# Altium PCB HU_revC_TEMP.PcbDoc (part 4 of 5)
Units mm, origin at the board's own origin, x right, y up, seen from the top; angles counter-clockwise.
Board outline 164 x 88 mm, 6 copper layers (Top Layer, Layer 1, Layer 2, Layer 3, Layer 4, Bottom Layer), stack 1.538 mm thick; 730 components, 570 nets, 2585 pads, 244 vias.
Unrouted connection lines stored in the file: 1558.
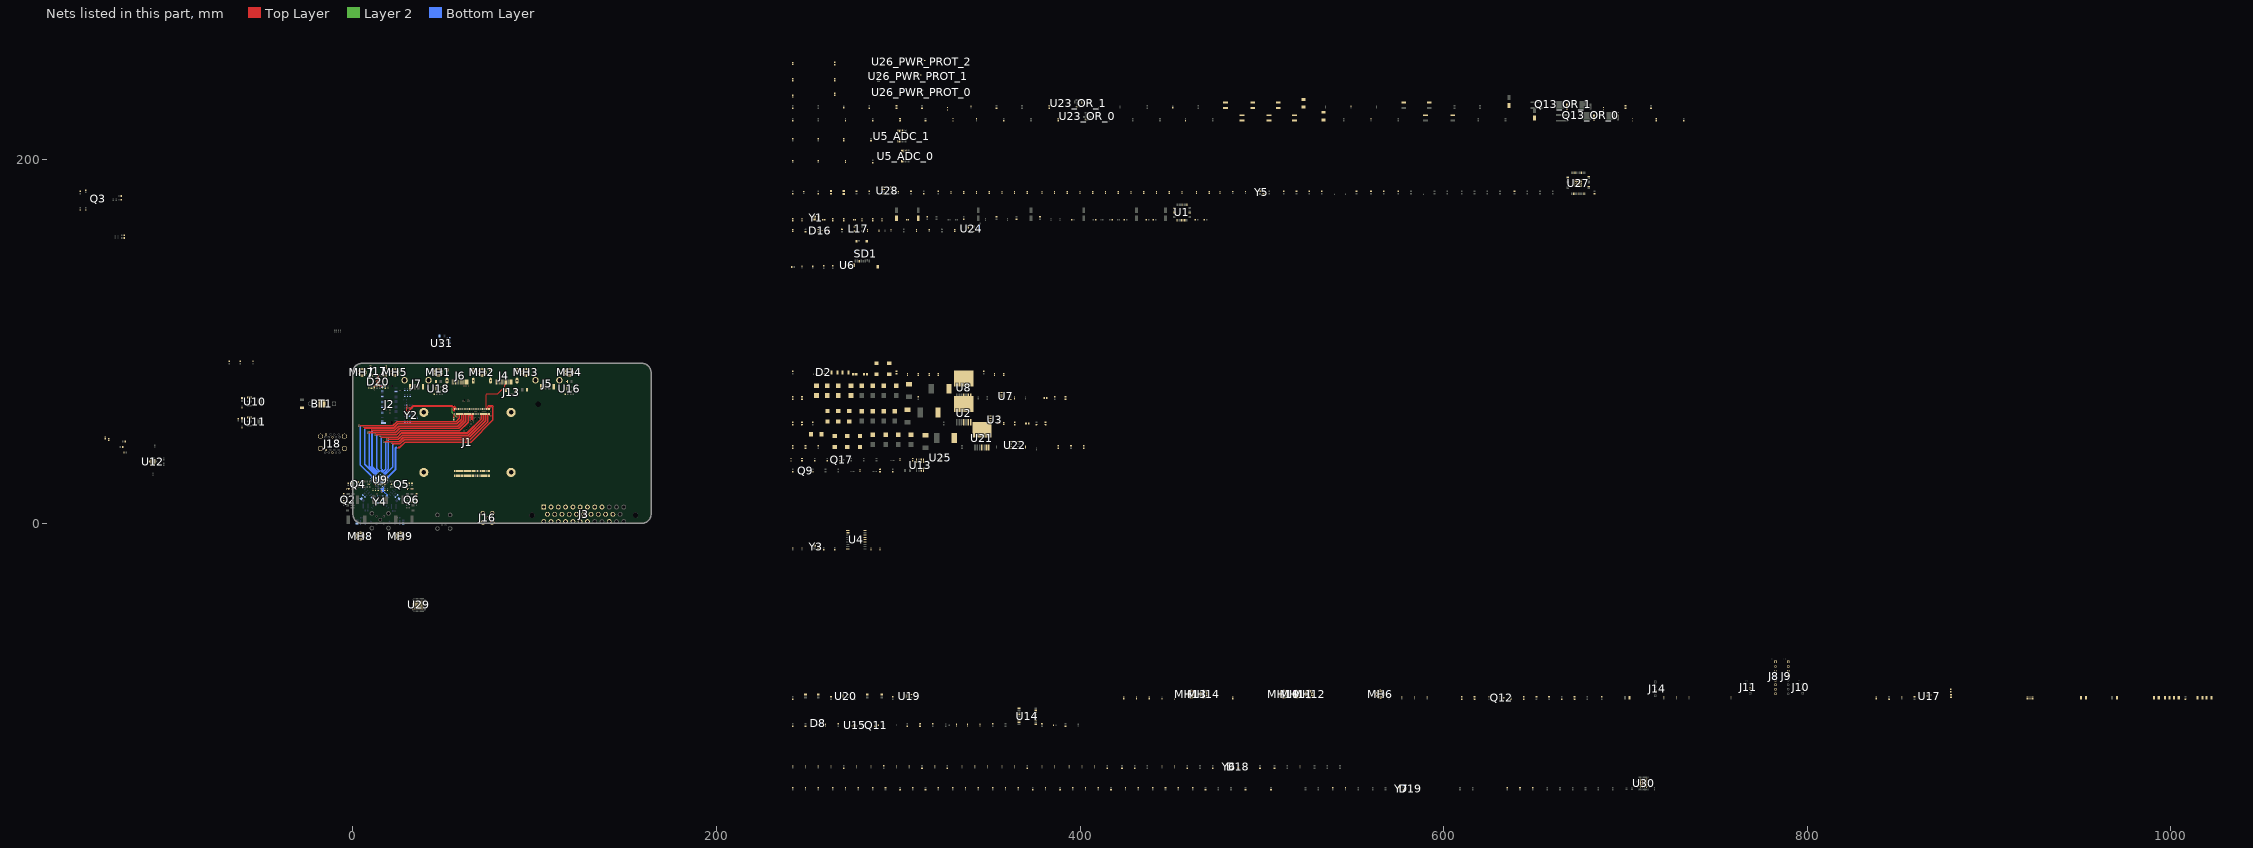
[diagram p4: the nets of this part, all layers, seen from the top]

## Via types
v1: diameter 0.5, hole 0.3, Top Layer to Bottom Layer, 244 vias

## Nets (pads, with @x,y where several pads share a name; then routed paths per layer and width w, separated by ;. In a path a pad name is that pad's centre, name@x,y a point inside that pad or via, vN(x,y) a via of type N, cw(c..) or ccw(c..) an arc to the next point about the centre after c; other vN are vias at no path point) (continued)
3V3_3V3_VCC_I_nFLT: R213_PWR_PROT_2.1 U26_PWR_PROT_2.6
3V3_3V3_VCC_I_SENSE: U26_PWR_PROT_2.11
3V3_5V0_MAIN_T_SENSE: R33.2 R36.2
3V3_5V0_MAIN_V_SENSE: R39.1 R40.2
3V3_5V0_VCC_I_nFLT: R213_PWR_PROT_1.1 U26_PWR_PROT_1.6
3V3_5V0_VCC_I_SENSE: U26_PWR_PROT_1.11
3V3_12V_MAIN_T_SENSE: R179.2 R181.2
3V3_12V_MAIN_V_SENSE: R185.1 R186.2
3V3_12V_VCC_I_nFLT: R213_PWR_PROT_0.1 U26_PWR_PROT_0.6
3V3_12V_VCC_I_SENSE: U26_PWR_PROT_0.11
3V3_AMP_I_nFLT: R119.1 U13.6
3V3_AMP_I_SENSE: R118.1
3V3_AMP_PWR_EN: R122.1
3V3_APM_OR_nFLT: R194_OR_1.1 U23_OR_1.12
3V3_AUX: C25.1 C55.1 C114.1 C138.1 F1.1 F11.2 F12.2 F14.2 Q3.1 Q3.4 R33.1 R38.2 R62.1 R67.2 R68.2 R79.2 R89.1 R119.2 R144.1 R179.1 R184.2 U3.8 U7.1 U7.2 U7.8 U13.8 U22.8
3V3_CAM_GPIO0: J1.97 R99.1 U9.11 | length 5.8
  Bottom Layer w0.2: U9.11@16.503,20.023 17,19.525 17,17.5 18.828,15.672 18.828,15.247 R99.1@18.79,15.21
3V3_CAM_GPIO1: J1.100
3V3_CAN_RX: U4.2 U24.4
3V3_CAN_TX: U4.1 U24.1
3V3_CAR_APM_I_SENSE: D14_OR_1.1 R198_OR_1.2 U23_OR_1.10
3V3_CAR_APM_V_SENSE: D11_OR_1.1 R187_OR_1.1 R188_OR_1.2
3V3_CAR_OR_nFLT: R194_OR_0.1 U23_OR_0.12
3V3_CAR_VCC_I_SENSE: D14_OR_0.1 R198_OR_0.2 U23_OR_0.10
3V3_CAR_VCC_INH: U17.2
3V3_CAR_VCC_nINH: R137.1 U17.4
3V3_CAR_VCC_V_SENSE: D11_OR_0.1 R187_OR_0.1 R188_OR_0.2
3V3_CPU_FAN_TACHO: J1.16 R156.2 R160.2
3V3_EEPROM_nWP: J1.20 R22.1
3V3_GPIO22: J1.46
3V3_GPIO23: J1.47
3V3_GPIO24: J1.45
3V3_GPIO26: J1.24
3V3_I2C0_SCL: J1.80 U9.29 U12.4
3V3_I2C0_SDA: J1.82 U9.28 U12.5
3V3_ID_SC: J1.35
3V3_ID_SD: J1.36
3V3_INPUT_I_SENSE: U25.11
3V3_INPUT_nI_FLT: R206.1 U25.6
3V3_INPUT_V_SENSE: D17.1 R211.1 R212.2
3V3_INT: C90.2 C91.2 C161.1 C167.1 C168_PWR_PROT_0.1 C168_PWR_PROT_1.1 C168_PWR_PROT_2.1 R113.2 R115.2 R194_OR_0.2 R194_OR_1.2 R206.2 R213_PWR_PROT_0.2 R213_PWR_PROT_1.2 R213_PWR_PROT_2.2 U12.2 U12.15 U24.5 U25.12 U26_PWR_PROT_0.12 U26_PWR_PROT_1.12 U26_PWR_PROT_2.12
3V3_MAIN: C119.1 D2.2 D2.3 J1.84 J1.86 R24.2 R160.1 R162.1 U17.5
3V3_MAX96724_0_EN_RF_A: R76.2
3V3_MAX96724_0_EN_RF_B: R91.2
3V3_MAX96724_0_EN_RF_C: R97.2
3V3_MAX96724_0_EN_RF_D: R104.2
3V3_MAX96724_nERRB: R87.1 U9.14 | length 2.4
  Bottom Layer w0.2: U9.14@15.442,18.962 16.25,18.154 16.25,17.267 16,17.017 v1(16,17)
3V3_MAX96724_nLOCK: R78.2 U9.13 | length 2.7
  Bottom Layer w0.2: U9.13@15.795,19.315 16.711,18.4 16.711,17.039 v1(16.75,17)
3V3_MISC: C46.1 C47.1 C50_ADC_0.1 C50_ADC_1.1 C115.1 C116.1 C118.1 D8.2 D8.3 F14.1 R56.1 R57.1 R58_ADC_0.1 R58_ADC_1.1 R59.2 R125.1 R131.1 U4.18 U5_ADC_0.2 U5_ADC_1.2 U6.5 U14.7 U14.8 U15.6
3V3_nBT_INH: J1.91 R26.2
3V3_nETH_G_LED: J1.17
3V3_nETH_Y_LED: J1.15
3V3_nLED_PWR: J1.95 R31.2
3V3_nRPI_BOOT: J1.93 R28.2
3V3_nWIFI_INH: J1.89 R25.2
3V3_OTG_ID: J1.101 R30.2 | length 2.3
  Top Layer w0.2: R30.2@55.5,58 55.5,58.5 55.7,58.7 J1.101@55.7,60.18
3V3_PCIE_nCLKREQ: J1.102 R42.2 | length 27.8
  Top Layer w0.178: v1(30,63.5) 31.75,63.5 33.25,65 54.505,65 55.7,63.805 J1.102@55.7,62.82
3V3_PCIE_nRST: J1.109 R41.2 | length 38.9
  Top Layer w0.178: v1(30,65) 30,64.192 29.511,63.703 29.511,61.797 29.797,61.511 30.516,61.511 33.471,64.466 54.284,64.466 54.75,64 v1(54.75,63.5) ; v1(57.25,58.25) 57.289,58.289 57.289,60.169 J1.109@57.3,60.18
  Layer 2 w0.3: v1(54.75,63.5) 54.75,60.75 v1(57.25,58.25)
3V3_PCIE_nWAKE: J1.104 R43.2 | length 30
  Top Layer w0.178: v1(30,62) 30.628,62 33.361,64.733 54.395,64.733 55.267,63.861 55.267,62.331 55.598,62 55.985,62 56.089,62.104 56.089,62.809 J1.104@56.1,62.82
3V3_PCIE_PWR_EN: J1.106 R50.2 | length 2.3
  Top Layer w0.2: v1(55.5,64.75) 56.5,63.75 J1.106@56.5,62.82
"3V3_PWM0_CH0 (GPIO12)": J1.31 R159.1
"3V3_PWM0_CH1 (GPIO13)": J1.28 R157.2 R158.2 R162.2
3V3_REG_EN: D5.1 R63.2 U8.7
3V3_REG_FB: C61.1 C62.1 C63.1 C64.1 L2.2 U7.3 U7.4 U8.6
3V3_SD_PWR_EN: J1.75 R60.2
"3V3_SPI0_MISO (GPIO9)": J1.40 U4.15
"3V3_SPI0_MOSI (GPIO10)": J1.44 U4.14
"3V3_SPI0_nCS0 (GPIO8)": J1.39 U4.16
"3V3_SPI0_nCS2 (GPIO3)": J1.56 R146.2
"3V3_SPI0_nCS3 (GPIO2)": J1.58 R148.2
"3V3_SPI0_SCLK (GPIO11)": J1.38 U4.13
"3V3_SPI1_MISO (GPIO19)": J1.26 R141.2 U5_ADC_0.15 U5_ADC_1.15
"3V3_SPI1_MOSI (GPIO20)": J1.27 R140.2 U5_ADC_0.14 U5_ADC_1.14
"3V3_SPI1_nCS0 (GPIO18)": J1.49 U5_ADC_0.1
"3V3_SPI1_nCS1 (GPIO27)": J1.48 R23.2 U5_ADC_1.1
"3V3_SPI1_nCS1_ALT (GPIO27)": J1.50 R23.1
"3V3_SPI1_nCS2 (GPIO16)": J1.29 R143.2
"3V3_SPI1_SCLK (GPIO21)": J1.25 R142.2 U5_ADC_0.16 U5_ADC_1.16
"3V3_SPI3_MISO (GPIO5)": J1.34
"3V3_SPI3_MOSI (GPIO6)": J1.30
"3V3_SPI3_nCS0 (GPIO4)": J1.54
"3V3_SPI3_nCS1 (GPIO8)": J1.41
"3V3_SPI3_SCLK (GPIO7)": J1.37
3V3_TCAN1146_MISO: R141.1 U24.6
3V3_TCAN1146_MOSI: R140.1 U24.11
3V3_TCAN1146_nCS: R143.1 U24.14
3V3_TCAN1146_SCLK: R142.1 U24.8
"3V3_UART0_RX (GPIO15)": J1.51 R163.1
"3V3_UART0_TX (GPIO14)": J1.55 R164.1
3V3_USB: C171.1 C172.1 C173.1 C174.1 C175.1 C176.1 C177.1 C178.1 C194.1 F11.1 R226.2 R228.2 R235.2 R238.2 R240.1 U27.2 U27.20 U27.31 U27.48 U28.1 U28.2
3V3_VBAT: D1.1 J1.76
3V3_VBUS_EN: J1.111 R175.2 R177.2
5V0_DAC: C11.1 C12.1 C13.1 C14.1 C15.1 C16.1 F8.1 R5.2 R9.2 R12.2 R15.2 U1.21 U1.27 U1.37
5V0_DISP: F10.1 F13.1 F15.1
  other v1: 117.5,77.5 117.5,78.5
5V0_HDMI0_CEC: J1.151 J4.13 | length 4
  Top Layer w0.2: v1(65.25,56.5) 65.867,57.117 65.867,59.316 65.7,59.483 J1.151@65.7,60.18
5V0_HDMI0_HOTP: J1.153 J4.19 | length 3.8
  Top Layer w0.2: v1(66,56.5) 66,56.581 66.156,56.737 66.156,59.436 66.1,59.491 J1.153@66.1,60.18
5V0_HDMI0_SCL: J1.200 J4.15 | length 1.5
  Top Layer w0.2: J1.200@75.3,62.82 75.3,63.55 75.443,63.693 75.943,63.693 v1(76,63.75)
5V0_HDMI0_SDA: J1.199 J4.16 | length 1.5
  Top Layer w0.2: J1.199@75.3,60.18 75.3,59.45 75.443,59.307 75.943,59.307 v1(76,59.25)
5V0_HDMI1_CEC: J1.149 J6.13 | length 4.2
  Top Layer w0.2: v1(64.5,56.5) 65.578,57.578 65.578,59.196 65.3,59.474 J1.149@65.3,60.18
  other v1: 60.75,75.5
5V0_HDMI1_HOTP: J1.143 J6.19 | length 1.6
  Top Layer w0.2: J1.143@64.1,60.18 64.1,59.15 v1(64.5,58.75)
  other v1: 63.5,75.5
5V0_HDMI1_SCL: J1.147 J6.15 | length 3.4
  Top Layer w0.2: v1(64.5,57.25) 65.289,58.039 65.289,59.077 64.9,59.466 J1.147@64.9,60.18
  other v1: 61.5,75.5
5V0_HDMI1_SDA: J1.145 J6.16 | length 2.6
  Top Layer w0.2: v1(64.5,58) 65,58.5 65,58.957 64.707,59.25 64.617,59.25 64.5,59.367 J1.145@64.5,60.18
  other v1: 62.15,75.5
5V0_INT: C160.1 U24.3
5V0_MAIN: F8.2 F9.2 F10.2 F16.2 F17.2 R39.2 R154.1 R155.1 U3.3 U3.4
5V0_MISC: U19.5 U20.5
5V0_nLED_ACT: J1.21 R32.2
5V0_nPWR_BTN: J1.92 R27.1
5V0_PMIC_EN: J1.99 R29.1
5V0_RPI: C19.2 C20.2 C21.1 C22.1 C23.1 C24.1 F9.1 J1.77 J1.79 J1.81 J1.83 J1.85 J1.87 R29.2 R214.1
5V0_USB2_CC1: J1.94 R167.1
5V0_USB2_CC2: J1.96 R168.1
5V_REG_EN: R34.1 R35.2 U2.7
5V_REG_FB: C31.1 C32.1 C33.1 L1.2 U2.6 U3.1 U3.2
12V0_MAIN: F7.2 R185.2 U22.3 U22.4
12V0_PoC: F2.2 F3.2 F4.2 F5.2 F7.1
  other v1: -3,18.75 -2,18.75 -0.5,18.75 0.5,18.75 29.5,18.75 30.5,18.75 32,18.75 33,18.75
12V0_REG_EN: D9.1 R180.2 U21.7
12V0_REG_FB: C144.1 C145.1 C146.1 C248.1 L16.2 U21.6 U22.1 U22.2
ACC_12V: J3.24
ACT_LED: J2.10 R49.2
AMBIENT_TEMP: R144.2 R145.2
AMP_VCC: J8.1 J8.2 J9.1 J9.2 U13.3 U13.4
ANT_DETECT: R134.2 U14.16
ANT_PWR_GATE: Q11.3 R126.2 R135.1
ANT_SENSE: R129.2 R130.1 U15.3
ANT_SHORT_N: C117.1 L15.1 R128.2 U14.17 U15.2
APM_VCC: C153_OR_1.2 C154_OR_1.2 C155_OR_1.2 D12_OR_1.2 Q13_OR_1.1-2-3 R147.2 U23_OR_1.2
BAT_12V: J3.1 J3.2 J3.13 J3.14
CAN_N: C164.1 D16.1 J3.29 L17.4 R204.2
CAN_P: C166.2 D16.2 J3.28 L17.1 R205.1
CAR_VCC: C153_OR_0.2 C154_OR_0.2 C155_OR_0.2 D12_OR_0.2 Q13_OR_0.1-2-3 U23_OR_0.2
CHA_FAN_PWM: Q12.3 R153.2 R155.2
"CM6206 _VBIAS": R19.2 U1.29
"CM6206 _X_N": C18.1 R21.1 U1.3 Y1.3
"CM6206 _X_P": C17.1 R21.2 U1.2 Y1.1
CM6206_REGV: C9.1 R1.1 U1.20
CM6206_USBD_N: R3.1 U1.19
CM6206_USBD_P: R2.1 U1.18
DBG_USB_N: C133.1 D20.4 D20.7 J17.A7 R166.1 | length 7.8
  Top Layer w0.158: C133.1@11.75,75.479 11.921,75.65 R166.1@13.25,75.65 13.558,75.958 13.716,75.958 13.821,76.064 13.821,77.071 13.632,77.26 13.632,77.268 13.5,77.4 D20.7@13.5,77.582 D20.4@13.5,78.417 13.5,78.6 13.632,78.732 13.632,78.74 13.821,78.929 13.821,81.179 J17.A7@13.75,81.25
DBG_USB_P: C132.1 D20.2 D20.9 J17.A6 R165.1 | length 7.8
  Top Layer w0.158: J17.A6@14.25,81.25 14.179,81.179 14.179,78.929 14.368,78.74 14.368,78.732 14.5,78.6 D20.2@14.5,78.417 D20.9@14.5,77.582 14.5,77.4 14.368,77.268 14.368,77.26 14.179,77.071 14.179,76.064 14.284,75.958 14.442,75.958 R165.1@14.75,75.65 16.079,75.65 C132.1@16.25,75.479
DISP0_5V: J4.18 J5.1 U16.1
DISP1_5V: J6.18 J7.1 U18.1
DPHY0_CK_N: J1.127 U9.40 | length 82.2
  Top Layer w0.123: v1(9.75,51.714) 9.797,51.714 10.011,51.5 11.592,51.5 23,51.5 25.25,53.75 57.75,53.75 60.938,56.938 60.938,59.599 60.938,60.142 J1.127@60.9,60.18
  Bottom Layer w0.123: v1(9.75,51.714) 9.797,51.714 10.011,51.5 10.457,51.5 10.823,51.134 10.823,31.234 13.454,28.603 13.579,28.603 U9.40@13.851,28.331
DPHY0_CK_P: J1.129 U9.39 | length 82.5
  Top Layer w0.123: v1(9.75,50.964) 9.797,50.964 10.011,51.177 11.458,51.177 23.134,51.177 25.384,53.427 57.884,53.427 61.262,56.804 61.262,59.599 61.262,60.142 J1.129@61.3,60.18
  Bottom Layer w0.123: v1(9.75,50.964) 9.797,50.964 10.011,51.177 10.323,51.177 10.5,51 10.5,31.1 13.226,28.374 13.226,28.249 U9.39@13.497,27.977
DPHY0_D0_N: J1.115 U9.32 | length 91.5
  Top Layer w0.123: v1(3.25,54.214) 3.297,54.214 3.511,54 6.597,54 22.043,54 24.293,56.25 56.75,56.25 58.538,58.038 58.538,59.599 58.538,60.142 J1.115@58.5,60.18
  Bottom Layer w0.123: v1(3.25,54.214) 3.297,54.214 3.511,54 3.957,54 4.323,53.634 4.323,32.077 10.626,25.774 10.751,25.774 U9.32@11.023,25.503
DPHY0_D0_P: J1.117 U9.31 | length 91.8
  Top Layer w0.123: v1(3.25,53.464) 3.297,53.464 3.511,53.677 6.463,53.677 ; 6.463,53.677 22.177,53.677 24.427,55.927 56.884,55.927 58.862,57.904 58.862,59.599 58.862,60.142 J1.117@58.9,60.18
  Bottom Layer w0.123: v1(3.25,53.464) 3.297,53.464 3.511,53.677 3.823,53.677 4,53.5 4,31.943 10.397,25.546 10.397,25.421 U9.31@10.669,25.149
DPHY0_D1_N: J1.121 U9.36 | length 87.9
  Top Layer w0.123: v1(5.75,52.964) 5.797,52.964 6.011,52.75 8.49,52.75 22.543,52.75 24.793,55 57.25,55 59.738,57.488 59.738,59.291 59.738,60.142 J1.121@59.7,60.18
  Bottom Layer w0.123: v1(5.75,52.964) 5.797,52.964 6.011,52.75 6.457,52.75 6.823,52.384 6.823,32.405 12.04,27.189 12.165,27.189 U9.36@12.437,26.917
DPHY0_D1_P: J1.123 U9.35 | length 88.2
  Top Layer w0.123: v1(5.75,52.214) 5.797,52.214 6.011,52.427 8.356,52.427 22.677,52.427 24.927,54.677 57.384,54.677 60.062,57.354 60.062,59.425 60.062,59.599 60.062,60.142 J1.123@60.1,60.18
  Bottom Layer w0.123: v1(5.75,52.214) 5.797,52.214 6.011,52.427 6.323,52.427 6.5,52.25 6.5,32.271 11.811,26.96 11.811,26.835 U9.35@12.083,26.563
DPHY0_D2_N: J1.133 U9.38 | length 85.6
  Top Layer w0.123: v1(8.25,50.464) 8.297,50.464 8.511,50.25 10.171,50.25 23.543,50.25 25.793,52.5 58.25,52.5 62.138,56.388 62.138,59.599 62.138,60.142 J1.133@62.1,60.18
  Bottom Layer w0.123: v1(8.25,50.464) 8.297,50.464 8.511,50.25 8.957,50.25 9.323,49.884 9.323,31.319 12.747,27.896 12.872,27.896 U9.38@13.144,27.624
DPHY0_D2_P: J1.135 U9.37 | length 85.8
  Top Layer w0.123: v1(8.25,49.714) 8.297,49.714 8.511,49.927 10.037,49.927 ; 10.037,49.927 23.677,49.927 25.927,52.177 58.384,52.177 62.462,56.254 62.462,59.599 62.462,60.142 J1.135@62.5,60.18
  Bottom Layer w0.123: v1(8.25,49.714) 8.297,49.714 8.511,49.927 8.823,49.927 9,49.75 9,31.186 12.519,27.667 12.519,27.542 U9.37@12.79,27.27
DPHY0_D3_N: J1.139 U9.42 | length 79.8
  Top Layer w0.123: v1(12.25,49.214) 12.297,49.214 12.511,49 13.99,49 ; 13.99,49 24.043,49 26.293,51.25 58.75,51.25 63.338,55.838 63.338,59.599 63.338,60.142 J1.139@63.3,60.18
  Bottom Layer w0.123: v1(12.25,49.214) 12.297,49.214 12.511,49 12.884,49 13.323,48.561 13.323,30.148 14.161,29.31 14.286,29.31 U9.42@14.558,29.038
DPHY0_D3_P: J1.141 U9.41 | length 80.1
  Top Layer w0.123: v1(12.25,48.464) 12.297,48.464 12.511,48.677 13.856,48.677 ; 13.856,48.677 24.177,48.677 26.427,50.927 58.884,50.927 63.662,55.704 63.662,59.599 63.662,60.142 J1.141@63.7,60.18
  Bottom Layer w0.123: v1(12.25,48.464) 12.297,48.464 12.511,48.677 12.75,48.677 13,48.427 13,30.014 13.933,29.081 13.933,28.956 U9.41@14.205,28.685
DPHY1_CK_N: J1.187 U9.46 | length 83.1
  Top Layer w0.123: v1(17.25,45.464) 17.297,45.464 17.511,45.25 20.597,45.25 25.543,45.25 27.793,47.5 29,47.5 64,47.5 72.938,56.438 72.938,59.599 72.938,60.142 J1.187@72.9,60.18
  Bottom Layer w0.123: U9.46@16.503,27.977 16.774,28.249 16.774,28.374 18.323,29.923 18.323,44.811 17.884,45.25 17.511,45.25 17.297,45.464 v1(17.25,45.464)
DPHY1_CK_P: J1.189 U9.45 | length 82.8
  Top Layer w0.123: v1(17.25,44.714) 17.297,44.714 17.511,44.927 20.463,44.927 25.677,44.927 27.927,47.177 29,47.177 64.134,47.177 73.262,56.304 73.262,60.142 J1.189@73.3,60.18
  Bottom Layer w0.123: U9.45@16.149,28.331 16.421,28.603 16.546,28.603 18,30.057 18,44.677 17.75,44.927 17.511,44.927 17.297,44.714 v1(17.25,44.714)
DPHY1_D0_N: J1.175 U9.44 | length 82.9
  Top Layer w0.123: v1(14.75,47.964) 14.797,47.964 15.011,47.75 19.097,47.75 24.543,47.75 26.793,50 29,50 63,50 70.538,57.538 70.538,59.599 70.538,60.142 J1.175@70.5,60.18
  Bottom Layer w0.123: v1(14.75,47.964) 14.797,47.964 15.011,47.75 15.286,47.75 15.592,47.444 15.823,47.213 15.823,30.15 16.295,29.679 16.295,29.309 16.067,29.081 16.067,28.956 U9.44@15.795,28.685
DPHY1_D0_P: J1.177 U9.43 | length 82.6
  Top Layer w0.123: v1(14.75,47.214) 14.797,47.214 15.011,47.427 18.963,47.427 24.677,47.427 26.927,49.677 29,49.677 63.134,49.677 70.862,57.404 70.862,60.142 J1.177@70.9,60.18
  Bottom Layer w0.123: v1(14.75,47.214) 14.797,47.214 15.011,47.427 15.152,47.427 15.5,47.079 15.5,30.016 15.971,29.545 15.971,29.442 15.839,29.31 15.714,29.31 U9.43@15.442,29.038
DPHY1_D1_N: J1.181 U9.48 | length 81.8
  Top Layer w0.123: v1(18.75,46.714) 18.797,46.714 19.011,46.5 21.472,46.5 25.043,46.5 27.293,48.75 29,48.75 63.5,48.75 71.738,56.988 71.738,59.108 71.738,59.599 71.738,60.142 J1.181@71.7,60.18
  Bottom Layer w0.123: U9.48@17.21,27.27 17.481,27.542 17.481,27.667 19.823,30.009 19.823,46.061 19.384,46.5 19.011,46.5 18.797,46.714 v1(18.75,46.714)
DPHY1_D1_P: J1.183 U9.47 | length 81.6
  Top Layer w0.123: v1(18.75,45.964) 18.797,45.964 19.011,46.177 21.338,46.177 25.177,46.177 27.427,48.427 29,48.427 63.634,48.427 72.062,56.854 72.062,58.974 72.062,60.142 J1.183@72.1,60.18
  Bottom Layer w0.123: U9.47@16.856,27.624 17.128,27.896 17.253,27.896 19.5,30.143 19.5,45.927 19.25,46.177 19.011,46.177 18.797,45.964 v1(18.75,45.964)
DPHY1_D2_N: J1.193 U9.50 | length 82.4
  Top Layer w0.123: v1(21.25,44.214) 21.297,44.214 21.511,44 26.043,44 28.293,46.25 29,46.25 64.5,46.25 74.138,55.888 74.138,59.599 74.138,60.142 J1.193@74.1,60.18
  Bottom Layer w0.123: U9.50@17.917,26.563 18.189,26.835 18.189,26.96 22.323,31.095 22.323,43.561 21.884,44 21.511,44 21.297,44.214 v1(21.25,44.214)
DPHY1_D2_P: J1.195 U9.49 | length 82.1
  Top Layer w0.123: v1(21.25,43.464) 21.297,43.464 21.511,43.677 26.177,43.677 28.427,45.927 29,45.927 64.634,45.927 74.462,55.754 74.462,60.142 J1.195@74.5,60.18
  Bottom Layer w0.123: U9.49@17.563,26.917 17.835,27.189 17.96,27.189 22,31.229 22,43.427 21.75,43.677 21.511,43.677 21.297,43.464 v1(21.25,43.464)
DPHY1_D3_N: J1.194 U9.54 | length 90.6
  Top Layer w0.123: v1(24.5,41.464) 24.547,41.464 24.761,41.677 25.884,41.677 28.884,44.677 65.134,44.677 77.323,56.866 77.323,64.134 76.634,64.823 74.818,64.823 74.138,64.143 74.138,63.575 74.138,63.401 74.138,62.858 J1.194@74.1,62.82
  Bottom Layer w0.123: U9.54@19.331,25.149 19.603,25.421 19.603,25.546 23.75,29.693 23.75,41.427 24,41.677 24.239,41.677 24.453,41.464 v1(24.5,41.464)
  other v1: 24.5,40.714
DPHY1_D3_P: J1.196 U9.53 | length 89.3
  Top Layer w0.123: v1(24.5,42.214) 24.547,42.214 24.761,42 25.75,42 28.75,45 65,45 77,57 77,64 76.5,64.5 74.952,64.5 74.462,64.009 74.462,63.709 74.462,62.858 J1.196@74.5,62.82
  Bottom Layer w0.123: U9.53@18.977,25.503 19.249,25.774 19.374,25.774 23.427,29.827 23.427,41.561 23.866,42 24.239,42 24.453,42.214 v1(24.5,42.214)
ETH_TRD0_N: J1.10 U29.3
ETH_TRD0_P: J1.12 U29.2
ETH_TRD1_N: J1.6 U29.6
ETH_TRD1_P: J1.4 U29.5
ETH_TRD2_N: J1.9 U29.8
ETH_TRD2_P: J1.11 U29.7
ETH_TRD3_N: J1.5 U29.11
ETH_TRD3_P: J1.3 U29.10
FAKRA_GND: C128.1 C129.1 C130.1 C131.1 J16.2
FL_N: J3.7 J8.5
FL_P: J3.6 J8.6
FR_N: J3.5 J8.7
FR_P: J3.4 J8.8
GND: BT1.3 C8.2 C9.2 C10.2 C11.2 C12.2 C13.2 C14.2 C15.2 C16.2 C17.2 C18.2 C19.1 C20.1 C21.2 C22.2 C23.2 C24.2 C25.2 C27.2 C28.2 C29.2 C30.2 C31.2 C32.2 C33.2 C36.2 C37.2 C38.2 C39.2 C40.2 C41.2 C42.2 C43.2 C44.2 C45.2 C46.2 C47.2 C48.2 C49.2 C50_ADC_0.2 C50_ADC_1.2 C51_ADC_0.2 C51_ADC_1.2 C52_ADC_0.2 C52_ADC_1.2 C53.2 C54.2 C55.2 C57.2 C58.2 C59.2 C60.2 C61.2 C62.2 C63.2 C64.2 C66.2 C68.1 C70.2 C72.1 C74.1 C75.1 C76.2 C78.1 C80.2 C82.1 C83.1 C84.2 C85.1 C86.2 C90.1 C91.1 C92.1 C93.1 C94.1 C95.1 C96.1 C97.1 C98.1 C99.1 C101.1 C102.1 C103.1 C104.1 C105.1 C106.1 C107.1 C108.1 C109.1 C110.1 C111.2 C112.2 C113.2 C114.2 C115.2 C116.2 C117.2 C118.2 C119.2 C120.2 C121.2 C122.2 C123.2 C124.2 C125.2 C126.2 C127.2 C128.2 C129.2 C130.2 C131.2 C132.2 C133.2 C134.2 C135.2 C136.2 C137.2 C138.2 C140.2 C141.2 C142.2 C143.2 C144.2 C145.2 C146.2 C147_OR_0.1 C147_OR_1.1 C148_OR_0.2 C148_OR_1.2 C149_OR_0.2 C149_OR_1.2 C152_OR_0.2 C152_OR_1.2 C153_OR_0.1 C153_OR_1.1 C154_OR_0.1 C154_OR_1.1 C155_OR_0.1 C155_OR_1.1 C156_OR_0.1 C156_OR_1.1 C158_OR_0.2 C158_OR_1.2 C159_OR_0.1 C159_OR_1.1 C160.2 C161.2 C162.2 C163.2 C164.2 C165.1 C166.1 C167.2 C168_PWR_PROT_0.2 C168_PWR_PROT_1.2 C168_PWR_PROT_2.2 C169.2 C170.2 C171.2 C172.2 C173.2 C174.2 C175.2 C176.2 C177.2 C178.2 C179.2 C180.2 C181.2 C182.2 C183.2 C184.2 C185.2 C186.2 C187.2 C188.2 C189.2 C190.2 C191.2 C192.2 C193.2 C194.2 C195.2 C196.2 C197.2 C198.2 C199.2 C200.2 C201.2 C202.2 C203.2 C204.2 C205.2 C206.2 C207.2 C208.2 C209.2 C210.2 C211.2 C212.2 C213.2 C214.2 C215.2 C216.2 C217.2 C218.2 C222.2 C223.2 C224.2 C225.2 C226.2 C227.2 C228.2 C229.2 C230.2 C231.2 C232.2 C233.2 C234.2 C235.2 C236.2 C237.2 C238.2 C239.2 C240.2 C241.2 C242.2 C243.2 C244.2 C245.2 C246.2 C247.2 C248.2 D3.2 D5.2 D6.2 D9.2 D10.2 D11_OR_0.2 D11_OR_1.2 D12_OR_0.1 D12_OR_1.1 D13_OR_0.2 D13_OR_1.2 D14_OR_0.2 D14_OR_1.2 D16.3 D17.2 D20.3 D20.8 J1.1 J1.2 J1.7 J1.8 J1.13 J1.14 J1.22 J1.23 J1.32 J1.33 J1.42 J1.43 J1.52 J1.53 J1.59 J1.60 J1.65 J1.66 J1.71 J1.74 J1.98 J1.107 J1.108 J1.113 J1.114 J1.119 J1.120 J1.125 J1.126 J1.131 J1.132 J1.137 J1.138 J1.144 J1.150 J1.155 J1.156 J1.161 J1.162 J1.167 J1.168 J1.173 J1.174 J1.179 J1.180 J1.185 J1.186 J1.191 J1.192 J1.197 J1.198 J1.201 J1.202 J1.203 J1.204 J2.1 J2.3 J2.9 J2.15 J2.21 J2.27 J2.33 J2.39 J2.45 J2.51 J2.57 J2.71 J2.73 J2.75 J2.76 J2.77 J3.3 J3.8 J3.9 J3.15 J3.16 J3.17 J3.18 J3.19 J3.20 J3.21 J3.22 J3.25 J3.26 J3.27 J3.30 J3.33 J4.2 J4.5 J4.8 J4.11 J4.17 J4.SH1 J4.SH2 J4.SH3 J4.SH4 J5.4 J5.5 J5.6 J6.2 J6.5 J6.8 J6.11 J6.17 J6.SH1 J6.SH2 J6.SH3 J6.SH4 J7.4 J7.5 J7.6 J8.3 J8.4 J9.3 J9.4 J10.2 J11.2 J13.3 J13.5 J13.6 J14.3 J17.A1_B12 J17.B1_A12 J17.SH1 J17.SH2 J17.SH3 J17.SH4 J18.4 J18.7 J18.13 J18.16 J18.19 J18.20 J18.21 J18.22 MH1.1 MH2.1 MH3.1 MH4.1 MH5.1 MH6.1 MH7.1 MH8.1 MH9.1 MH10.1 MH11.1 MH12.1 MH13.1 MH14.1 MP1.1 Q2.5 Q4.5 Q5.5 Q6.5 Q9.2 Q11.2 Q12.2 Q17.2 R4.1 R7.1 R11.1 R14.1 R18.1 R22.2 R25.1 R26.1 R27.2 R28.1 R30.1 R35.1 R36.1 R40.1 R47.2 R51.1 R61.1 R64.1 R69.1 R74.1 R75.1 R77.1 R80.1 R81.1 R86.1 R88.1 R90.1 R92.1 R96.1 R98.1 R103.1 R105.1 R106.1 R117.2 R123.1 R130.2 R133.2 R139.1 R145.1 R149.1 R151.1 R158.1 R161.2 R169.2 R170.2 R176.1 R178.1 R181.1 R186.1 R188_OR_0.1 R188_OR_1.1 R196_OR_0.1 R196_OR_1.1 R197_OR_0.1 R197_OR_1.1 R198_OR_0.1 R198_OR_1.1 R199_OR_0.1 R199_OR_1.1 R201_OR_0.1 R201_OR_1.1 R210.1 R212.1 R218.2 R227.2 R229.2 R230.2 R231.2 R232.2 R233.2 R236.1 R237.2 R241.1 R246.1 R247.1 R248.1 R249.1 R251.1 R253.1 R254.1 R259.2 R265.2 R266.2 R277.1 R278.1 R283.2 R289.2 R290.2 SD1.6 SD1.10 SD1.11 SD1.12 SD1.13 SW1.1 U1.4 U1.6 U1.7 U1.13 U1.22 U1.30 U1.42 U2.4 U2.8 U3.5 U4.9 U5_ADC_0.3 U5_ADC_0.12 U5_ADC_1.3 U5_ADC_1.12 U6.2 U7.5 U8.4 U8.8 U9.57 U10.1 U11.1 U12.3 U12.17 U13.5 U14.1 U14.10 U14.12 U15.5 U15.7 U16.2 U17.3 U18.2 U19.2 U20.2 U21.4 U21.8 U22.5 U23_OR_0.13 U23_OR_1.13 U24.2 U25.5 U26_PWR_PROT_0.5 U26_PWR_PROT_1.5 U26_PWR_PROT_2.5 U27.EPAD U28.4 U29.49 U30.49 U31.2 Y1.2 Y1.4 Y2.2 Y3.2 Y3.4 Y4.2 Y4.4 Y5.2 Y5.4 Y6.2 Y6.4 Y7.2 Y7.4
  other v1: 707.801,-145.2 708.901,-145.2 710.001,-145.2 711.101,-145.2 712.201,-145.2 707.801,-144.1 708.901,-144.1 710.001,-144.1 711.101,-144.1 712.201,-144.1 707.801,-143 708.901,-143 710.001,-143 711.101,-143 712.201,-143 707.801,-141.9 708.901,-141.9 710.001,-141.9 711.101,-141.9 712.201,-141.9 707.801,-140.8 708.901,-140.8 710.001,-140.8 711.101,-140.8 712.201,-140.8 34.05,-47.1 35.15,-47.1 36.25,-47.1 37.35,-47.1 38.45,-47.1 34.05,-46 35.15,-46 36.25,-46 37.35,-46 38.45,-46 34.05,-44.9 35.15,-44.9 36.25,-44.9 37.35,-44.9 38.45,-44.9 34.05,-43.8 35.15,-43.8 36.25,-43.8 37.35,-43.8 38.45,-43.8 34.05,-42.7 35.15,-42.7 36.25,-42.7 37.35,-42.7 38.45,-42.7 -2.5,11.7 13.25,16.25 15.5,17.75 15,21.667 9.25,21.75 20.75,21.75 14.222,22.444 15.778,22.444 27,22.8 13.444,23.222 15,23.222 16.556,23.222 12.667,24 14.222,24 15.778,24 17.333,24 13.444,24.778 15,24.778 16.556,24.778 14.222,25.556 15.778,25.556 15,26.333 61.25,50.75 62.5,52 63.75,53.25 65,54.5 66.25,55.75 67.425,57.25 69.175,57.25 66.725,58 67.475,58 69.125,58 69.875,58 20.25,60.75 57,61.5 64,61.5 65.25,61.5 66.5,61.5 67.75,61.5 69,61.5 70.25,61.5 71.5,61.5 72.75,61.5 74,61.5 75.25,61.5 18.25,62.25 20.25,62.25 18.25,63.75 20.25,63.75 20.25,65.25 60.725,67.25 61.475,67.25 63.125,67.25 63.875,67.25 61.425,68 63.175,68 26,73 27.25,73 11.75,73.5 12,78 14,78 16,78 672.501,185.5 673.501,185.5 674.501,185.5 675.501,185.5 672.501,186.5 673.501,186.5 674.501,186.5 675.501,186.5 672.501,187.5 673.501,187.5 674.501,187.5 675.501,187.5 672.501,188.5 673.501,188.5 674.501,188.5 675.501,188.5
GPS_TIMEPULSE: R136.1 U14.4
HDMI0_CK_N: J1.190 J4.12 | length 22.8
  Top Layer w0.123: J1.190@73.3,62.82 73.262,62.858 73.262,63.401 73.262,70.762 73.75,71.25 79.75,71.25 83.662,75.162 83.662,76.19 83.8,76.328 83.8,76.339 84,76.539 J4.12@84,77.69